# EAGLE board lm3410-boost-flashlight-driver-20mm-mk-1.1 (EAGLE 7.5.0)
VERSION: v1.1
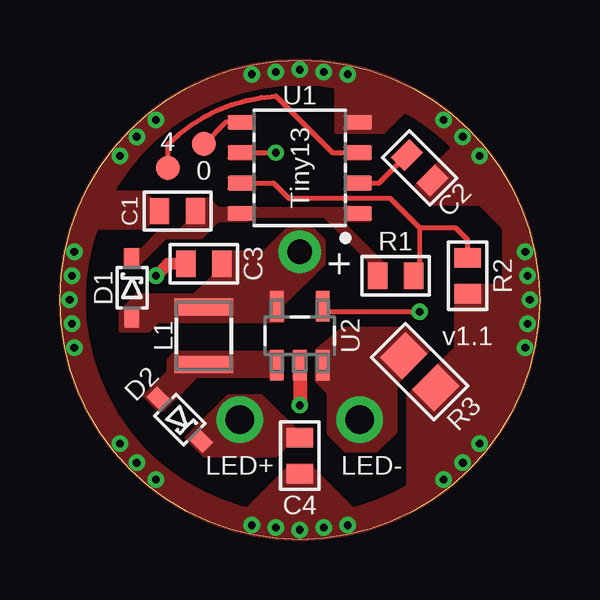
[diagram p0: board, top side]
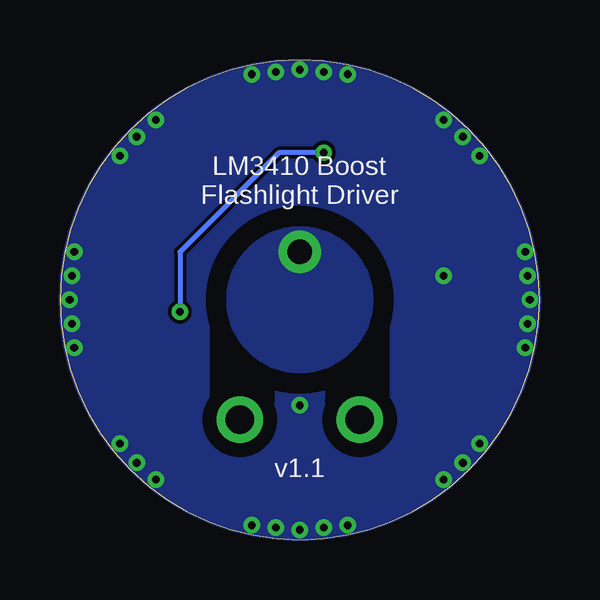
[diagram p1: board, bottom side, seen from below]

Size 20 x 20 mm. Coordinates in mm from the lower left corner, seen from the top.
Outline: 0,10 arc-180 20,10 arc-180 0,10
Copper layers (1*16): Top 0.0356mm / dielectric 1.5011mm / Bottom 0.0356mm
Design rules "LaenPCBOrder2 *": minimum track width 6mil, minimum drill 13mil, track to track 6mil, track to pad 6mil, pad to pad 6mil, via to via 6mil, smd to smd 6mil, copper to edge 0mil, drill to drill 6mil, minimum pad ring 7mil, minimum via ring 7mil, stop-mask expansion 3mil, vias tented up to drill 20mil, thermal gap 10mil
bRestrict: area 6.2,3.7 to 8.8,6.3; area 11.2,3.7 to 13.8,6.3; area 6.5,6.5 to 13.5,13.5; area 6.5,5.8 to 8.7,8.7; area 11.3,5.8 to 13.5,8.7

## Footprints (pad centres in the part's own frame; a part is rotated, then mirrored left to right if it is on the bottom)
1X01-SMD-1MM-DIA-NS = smd 1 x 1: P$1 0,0
1X01-1MM-CIR-NS = drill 1.016 pad 1.778: 1 0,0
1X01_NOSILK_NOSTOP = drill 0.33: P$1 0,0
C0603-TIGHTER = smd 0.8 x 1.1: 1 -0.75,0; 2 0.75,0
SOD323-SCHOTTKY = smd 0.8 x 0.6: A -1.25,0; C 1.25,0
PFL2512 = smd 0.7 x 2.45: P$1 -1.2,0; P$2 1.2,0
1X01-1.2MM-NS = drill 1.2 pad 1.93: P$1 0,0
R0603-TIGHTER = smd 0.8 x 1.1: 1 -0.75,0; 2 0.75,0
R0805 = smd 1.3 x 1.5: 1 -0.95,0; 2 0.95,0
SO08-NARROWER = smd 0.6 x 1.2: 1 -1.905,-2.416; 2 -0.635,-2.416; 3 0.635,-2.416; 4 1.905,-2.416; 5 1.905,2.416; 6 0.635,2.416; 7 -0.635,2.416; 8 -1.905,2.416
SOT95P285X120-5N = smd 1.27 x 0.559: 1 -1.219,0.965; 2 -1.219,0; 3 -1.219,-0.965; 4 1.219,-0.965; 5 1.219,0.965

## Placement (x,y rotation side)
0  M01SMD-1MM-DIA-NS  [1X01-SMD-1MM-DIA-NS]  6,16.5 180 top
4  M01SMD-1MM-DIA-NS  [1X01-SMD-1MM-DIA-NS]  4.5,15.5 0 top
+  M01PTH-1MM-CIR-NS  [1X01-1MM-CIR-NS]  10,12 180 top
-  M01NOT-A-VIA-NOPE  [1X01_NOSILK_NOSTOP]  0.4,10 90 bottom
C1  10u  [C0603-TIGHTER]  4.9,13.7 180 top
C2  1u  [C0603-TIGHTER]  15,15.5 315 top
C3  4u7  [C0603-TIGHTER]  6,11.5 180 top
C4  10u  [C0603-TIGHTER]  10,3.5 270 top
D1  BAT165  [SOD323-SCHOTTKY]  3,10.5 90 top
D2  BAT165  [SOD323-SCHOTTKY]  5,5 315 top
FRAME1  FRAME-LETTERNO_PACKAGE  [DUMMY]  0,0 0 top
L1  1uH  [PFL2512]  6,8.5 270 top
LED+  M01PTH-1.2MM-NS  [1X01-1.2MM-NS]  7.5,5 270 top
LED-  M01PTH-1.2MM-NS  [1X01-1.2MM-NS]  12.5,5 180 top
R1  19K  [R0603-TIGHTER]  14,11 180 top
R2  4K7  [R0603-TIGHTER]  17,11 90 top
R3  0R127  [R0805]  15,7 135 top
U1  Tiny13  [SO08-NARROWER]  10,15.5 90 top
U2  LM3410XMF  [SOT95P285X120-5N]  10,8.5 90 top

## Library data of the parts
0 4 + - C1-C4 D1 D2 L1 LED+ LED- R1-R3 U1 = a_parts
FRAME1 = a_parts; DESIGNER: sean@yak.net; VERSION: v1.1
U2 = a_parts; MPN: LM3410XMF; OC_FARNELL: 1685357; OC_NEWARK: 75M6032; PACKAGE: SOT-5; SUPPLIER: National Semiconductor

## Nets
0: 0.P$1 U1.5
4: 4.P$1 U1.3
GND: -.P$1 C1.2 C2.2 C3.2 C4.2 R2.1 R3.1 U1.4 U2.2
N$2: C2.1 U1.2
PWM1: U1.6 U2.4
SW: D2.A L1.P$2 U2.1
VBAT: +.1 C3.1 D1.A L1.P$1 U2.5
VCC: C1.1 D1.C R1.2 U1.1 U1.8
VDIV: R1.1 R2.2 U1.7
WHITE+: C4.1 D2.C LED+.P$1
WHITE-: LED-.P$1 R3.2 U2.3

## Tracks (layer width: path | path; a pad name or v marks a point on that pad's centre or on a via)
0
  Top 0.2: U1.5 6.91,17.41 0.P$1
4
  Top 0.2: 4.P$1 4.5,16.5 arc-40 9,18.5 11.37,16.14 U1.3
GND  (via drill 0.33)
  Top 0.5: C3.2 4.5,11.5 v4,11
  Top 0.575: U2.2 v10,5.6
  other vias: 2.5,4 0.6,12 0.6,8 10,0.4 3.2,3.2 4,2.5 0.5,9 0.5,11 9,19.5 10,19.6 11,19.5 19.6,10 19.5,11 19.5,9 9,0.5 11,0.5 8,0.6 3.2,16.8 2.5,16 4,17.5 16,17.5 16.8,16.8 17.5,16 16.8,3.2 16,2.5 17.5,4 12,0.6 8,19.4 12,19.4 19.4,12 19.4,8
  pour Top (isolate 0.152, rank 6, no thermals): 0,10 arc90 10,0 arc90 20,10 19,10 arc-90 10,1 arc-90 1,10
  pour Bottom (isolate 0.152, rank 6, no thermals): 10,0 arc-90 0,10 arc-90 10,20 arc-90 20,10 arc-90
  pour Top (isolate 0.152, rank 6, no thermals): 20,10 arc90 10,20 arc90 0,10 1,10 arc-90 10,19 arc-90 19,10
  pour Top (isolate 0.152, rank 5, no thermals): 15,2 14.5,2 14.5,6 16.5,8 16.5,10.6 18.1,10.6 18.5,11 18.5,13 17.5,14 15.5,14 14.8,14.7 16.5,16.5 17.5,16.5 18.5,15 18.5,14 19.5,13 19.5,8 19,7.5 19,6
  pour Top (isolate 0.152, rank 5, no thermals): 11.5,19.5 11.5,17 13.5,17 14.5,18 14.5,18.5 14,19 13,19 12.5,19.5
  pour Top (isolate 0.152, rank 5, no thermals): 7.5,0.5 12.5,0.5 12.5,1 10.5,3 9.5,3 7.5,1
  pour Top (isolate 0.152, rank 5, no thermals): 1,13 1,14 1.5,14.5 3.5,14.5 4,14 4,13.5 3.5,13
N$2
  Top 0.2: U1.2 13.3,14.87 C2.1
PWM1  (via drill 0.33)
  Top 0.2: U1.6 v9,16.14 | v15,9.5 11.18,9.5 U2.4
  Bottom 0.2: v9,16.14 10.87,16.14 15,12 v15,9.5
SW
  pour Top (isolate 0.152, rank 5, no thermals): 3.5,6 4.5,7 4.5,7.5 4.8,7.8 9.2,7.8 9.2,6.8 5.7,6.8 4.3,5.4 4.1,5.4
VBAT
  pour Bottom (isolate 0.152, no thermals): 7,10 arc-180 13,10 arc-180
  pour Top (isolate 0.152, rank 5, no thermals): 2.5,9.5 3.2,10.2 5.6,10.2 6.4,11 6.4,12 8.5,12 9.5,13 10.5,13 11,12.5 11,11.5 9.3,9.8 9.3,9.1 4.1,9.1 3.7,8.7 2.5,8.7
VCC
  pour Top (isolate 0.152, rank 5, no thermals): 2.7,11.5 3.3,11.5 4.4,12.6 5.9,12.6 6.6,13.3 7.8,13.3 8,13.5 11,13.5 13,11.5 13,10.6 13.5,10.6 13.5,11.5 11.7,13.3 12.9,13.3 12.9,13.8 6.6,13.8 6.2,14.2 5.3,14.2 5.3,13.2 5,12.9 4.2,12.9 3.4,12.1 2.7,12.1
VDIV
  Top 0.2: U1.7 8.9,14.87 9.54,14.23 13.77,14.23 15,13 | R1.1 15,11.25 15,13 | R2.2 17,12.5 16.5,13 15,13
WHITE+
  pour Top (isolate 0.152, rank 5, no thermals): 5.25,4.25 6,3.5 9,3.5 9.5,4 10,4 10,4.4 8.4,6 7,6
WHITE-
  pour Top (isolate 0.152, rank 5, no thermals): 10.7,7.9 10.7,6.6 11.2,6.1 11.2,4.4 11.9,3.7 13.2,3.7 14,4.5 14,6.5 15.4,7.9 14.5,8.8 11.8,8.8

## Text on the board
bPlace: LM3410 Boost / Flashlight Driver